# EAGLE board astable_sch (1) (EAGLE 8.7.0)
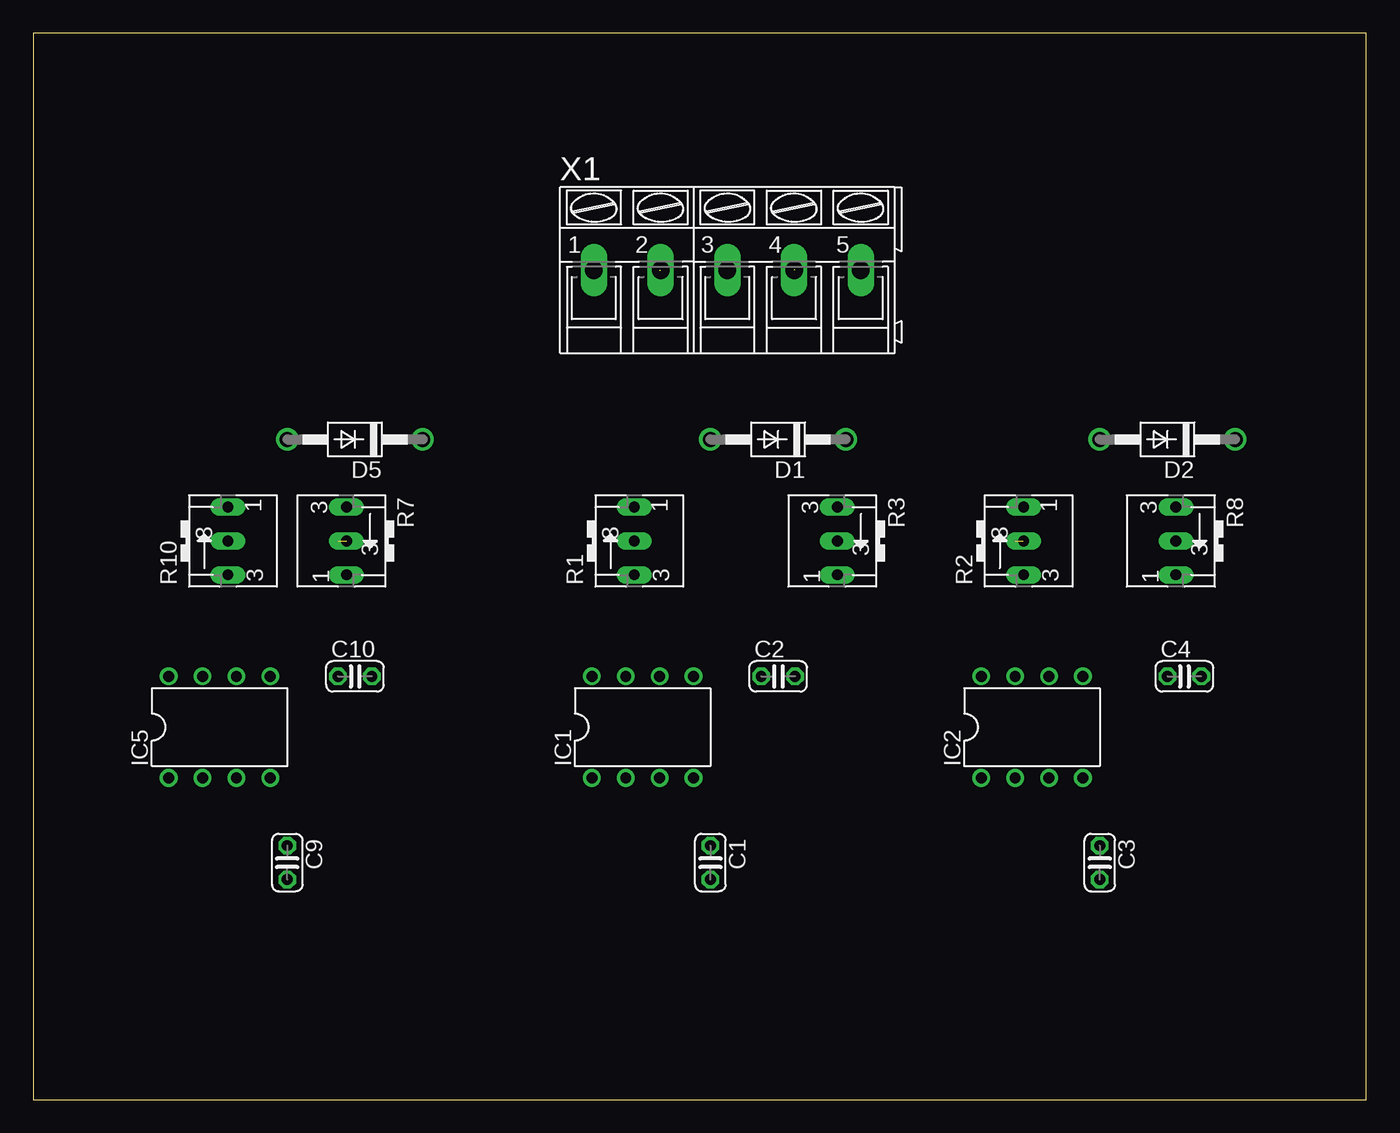
[diagram p0: board, top side]
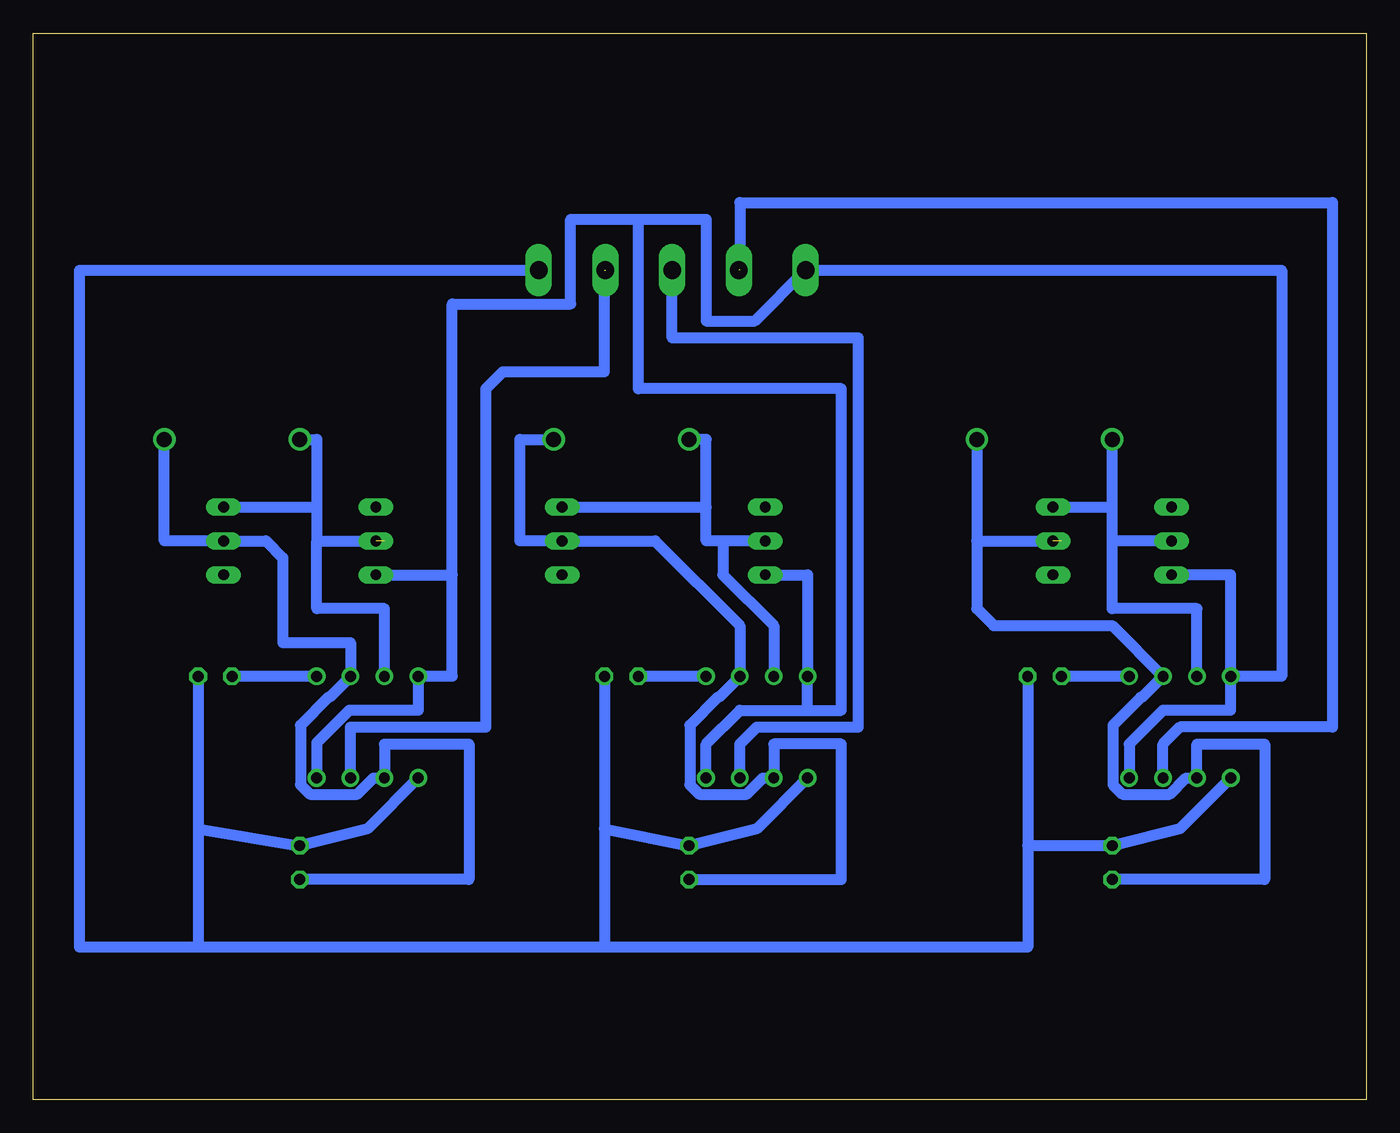
[diagram p1: board, bottom side, seen from below]

Size 100 x 80 mm. Coordinates in mm from the lower left corner, seen from the top.
Outline: 0,0 100,0 100,80 0,80 0,0
Copper layers (1*16): Top 0.035mm / dielectric 1.5mm / Bottom 0.035mm
Design rules "default": minimum track width 6mil, minimum drill 0.35mm, track to track 6mil, track to pad 6mil, pad to pad 6mil, via to via 6mil, smd to smd 6mil, copper to edge 40mil, drill to drill 6mil, minimum pad ring 10mil, minimum via ring 8mil, stop-mask expansion 4mil, vias tented up to drill 0mil, thermal gap 10mil

## Footprints (pad centres in the part's own frame; a part is rotated, then mirrored left to right if it is on the bottom)
C025-024X044 = drill 0.813 octagon: 1 -1.27,0; 2 1.27,0
DO41-10 = drill 1.118: A 5.08,0; C -5.08,0
DIL08 = drill 0.813 pad 1.27: 1 -3.81,-3.81; 2 -1.27,-3.81; 3 1.27,-3.81; 4 3.81,-3.81; 5 3.81,3.81; 6 1.27,3.81; 7 -1.27,3.81; 8 -3.81,3.81
B25V = drill 0.813 long: A 2.54,0.635; E -2.54,0.635; S 0,0.635
AK300/5 = drill 1.321 long: 1 -10.008,0; 2 -5.004,0; 3 0,0; 4 5.004,0; 5 10.008,0

## Placement (x,y rotation side)
C1  [C025-024X044]  50.8,17.78 270 top
C2  [C025-024X044]  55.88,31.75 0 top
C3  [C025-024X044]  80.01,17.78 270 top
C4  [C025-024X044]  86.36,31.75 0 top
C9  [C025-024X044]  19.05,17.78 270 top
C10  [C025-024X044]  24.13,31.75 0 top
D1  1N4004  [DO41-10]  55.88,49.53 180 top
D2  1N4004  [DO41-10]  85.09,49.53 180 top
D5  1N4004  [DO41-10]  24.13,49.53 180 top
IC1  LM555N  [DIL08]  45.72,27.94 0 top
IC2  LM555N  [DIL08]  74.93,27.94 0 top
IC5  LM555N  [DIL08]  13.97,27.94 0 top
R1  [B25V]  45.72,41.91 90 top
R2  [B25V]  74.93,41.91 90 top
R3  [B25V]  59.69,41.91 270 top
R7  [B25V]  22.86,41.91 270 top
R8  [B25V]  85.09,41.91 270 top
R10  [B25V]  15.24,41.91 90 top
X1  [AK300/5]  52.07,62.23 0 top

## Library data of the parts
C1-C4 C9 C10 = rcl; SPICEPREFIX: C
D1 D2 D5 = diode
IC1 IC2 IC5 = linear
R1-R3 R7 R8 R10 = pot
X1 = con-ptr500; OC_FARNELL: unknown; OC_NEWARK: unknown

## Nets
GND: C1.1 C2.2 C3.1 C4.2 C9.1 C10.2 IC1.1 IC2.1 IC5.1 X1.5
N$1: D1.A IC1.7 R1.S R3.E
N$2: C1.2 D1.C IC1.2 IC1.6 R3.S
N$3: C2.1 IC1.5
N$4: IC1.3 X1.3
N$6: D2.A IC2.7 R2.S R8.E
N$7: C3.2 D2.C IC2.2 IC2.6 R8.S
N$8: C4.1 IC2.5
N$9: IC2.3 X1.4
N$21: D5.A IC5.7 R7.E R10.S
N$22: C9.2 D5.C IC5.2 IC5.6 R7.S
N$23: C10.1 IC5.5
N$24: IC5.3 X1.2
VCC: IC1.4 IC1.8 IC2.4 IC2.8 IC5.4 IC5.8 R1.E R2.E R10.E X1.1

## Tracks (layer width: path | path; a pad name or v marks a point on that pad's centre or on a via)
GND
  Bottom 0.813: IC1.1 45.72,20.32 C1.1 57.15,20.32 | C2.2 57.15,20.32 | IC2.1 74.93,20.32 C3.1 87.63,20.32 | C4.2 87.63,20.32 | 57.15,11.43 87.63,11.43 | 87.63,11.43 96.52,11.43 96.52,62.23 X1.5 | 57.15,20.32 57.15,11.43 | 87.63,20.32 87.63,11.43 | IC5.1 13.97,20.32 C9.1 25.4,19.05 | C10.2 25.4,19.05 | 25.4,19.05 25.4,11.43 57.15,11.43
N$1
  Bottom 0.813: D1.A 49.53,49.53 49.53,44.45 | R1.S 48.26,41.91 | 48.26,41.91 49.53,41.91 49.53,44.45 | R3.E 49.53,44.45 | 48.26,41.91 48.26,39.37 44.45,35.56 IC1.7
N$2
  Bottom 0.813: D1.C 63.5,49.53 63.5,41.91 R3.S | R3.S 53.34,41.91 46.99,35.56 IC1.6 48.56,30.18 48.66,30.18 50.75,28.09 50.75,23.62 50.03,22.91 46.48,22.91 45.27,24.13 IC1.2 44.45,26.67 39.37,26.67 39.37,16.51 C1.2 | R3.S 62.23,41.91
N$3
  Bottom 0.813: IC1.5 C2.1
N$4
  Bottom 0.813: IC1.3 46.99,26.67 45.72,27.94 38.1,27.94 38.1,53.34 38.1,57.15 52.07,57.15 X1.3
N$6  (1 unrouted)
  Bottom 0.813: D2.A 78.74,49.53 78.74,44.45 | 78.74,44.45 78.74,41.91 | 78.74,41.91 73.66,41.91 | IC2.7 73.66,36.83 78.74,36.83 78.74,41.91 | R8.E 78.74,44.45
N$7
  Bottom 0.813: D2.C 90.17,41.91 R8.S 82.55,41.91 81.28,40.64 81.28,34.29 76.2,34.29 IC2.6 77.78,30.18 77.87,30.18 79.96,28.09 79.96,23.62 79.25,22.91 75.69,22.91 74.48,24.13 IC2.2 73.66,26.67 67.31,26.67 67.31,16.51 C3.2
N$8
  Bottom 0.813: IC2.5 C4.1
N$9  (1 unrouted)
  Bottom 0.813: IC2.3 76.2,27.94 66.04,27.94 66.04,53.34 64.77,54.61 57.15,54.61 57.15,62.23
N$21
  Bottom 0.813: R10.S 19.05,41.91 | 19.05,41.91 19.05,44.45 | 19.05,44.45 D5.A | IC5.7 12.7,36.83 19.05,36.83 19.05,41.91 | R7.E 19.05,44.45
N$22  (1 unrouted)
  Bottom 0.813: D5.C 29.21,41.91 | 29.21,41.91 22.86,41.91 | 29.21,41.91 29.21,36.83 27.94,35.56 19.05,35.56 IC5.6 16.82,30.18 16.91,30.18 19,28.09 19,23.62 18.29,22.91 14.73,22.91 13.52,24.13 IC5.2 12.7,26.67 7.62,26.67 7.62,16.51 C9.2
N$23
  Bottom 0.813: IC5.5 C10.1
N$24  (1 unrouted)
  Bottom 0.813: IC5.3 15.24,26.67 13.97,27.94 2.54,27.94 2.54,67.31 46.99,67.31 46.99,62.23
VCC
  Bottom 0.813: IC5.8 10.16,29.21 15.24,29.21 17.78,26.67 IC5.4 | 41.91,29.21 IC1.8 41.91,39.37 R1.E | X1.1 39.37,62.23 | 41.91,29.21 39.37,29.21 39.37,53.34 54.61,53.34 54.61,66.04 | X1.1 6.35,62.23 6.35,31.75 IC5.8 | 54.61,66.04 49.53,66.04 49.53,58.42 45.87,58.42 X1.1 | 54.61,66.04 59.69,66.04 59.69,59.69 68.58,59.69 68.58,39.37 | 68.58,39.37 68.58,31.75 IC2.8 71.12,29.21 76.3,29.21 78.74,26.77 IC2.4 | IC1.4 49.53,26.67 46.99,29.21 41.91,29.21 | IC5.8 10.16,39.37 R10.E | R2.E 68.58,39.37